# Altium PCB Carte_Barriere_Optique_Interface.PcbDoc
Units mm, origin at the board's own origin, x right, y up, seen from the top; angles counter-clockwise.
Board outline 17.3 x 52.7 mm, 2 copper layers (Top Layer, Bottom Layer); 28 components, 18 nets, 72 pads, 0 vias.
Unrouted connection lines stored in the file: 17.
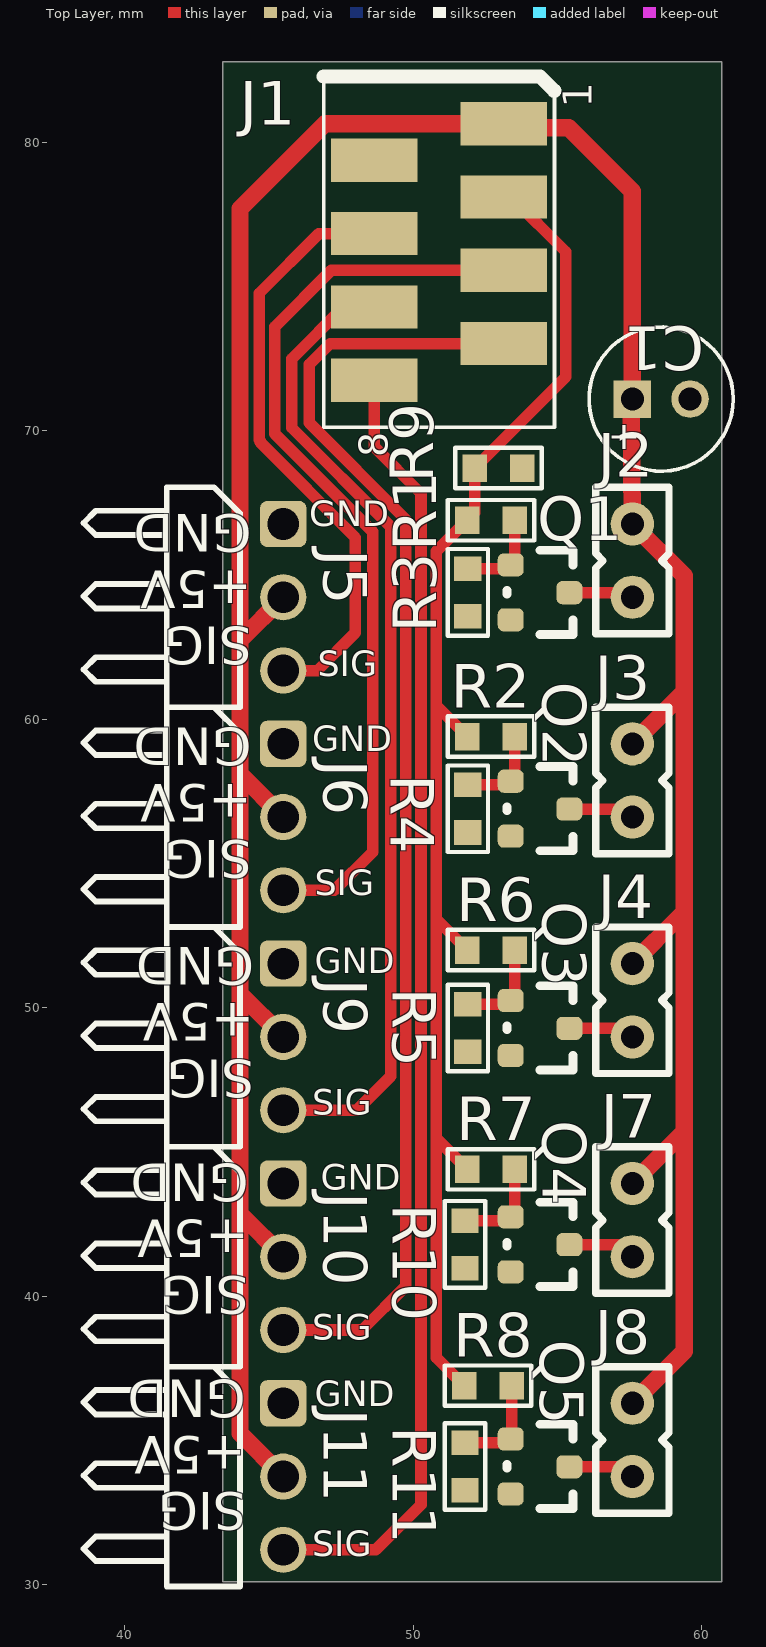
[diagram p0: Top Layer view]
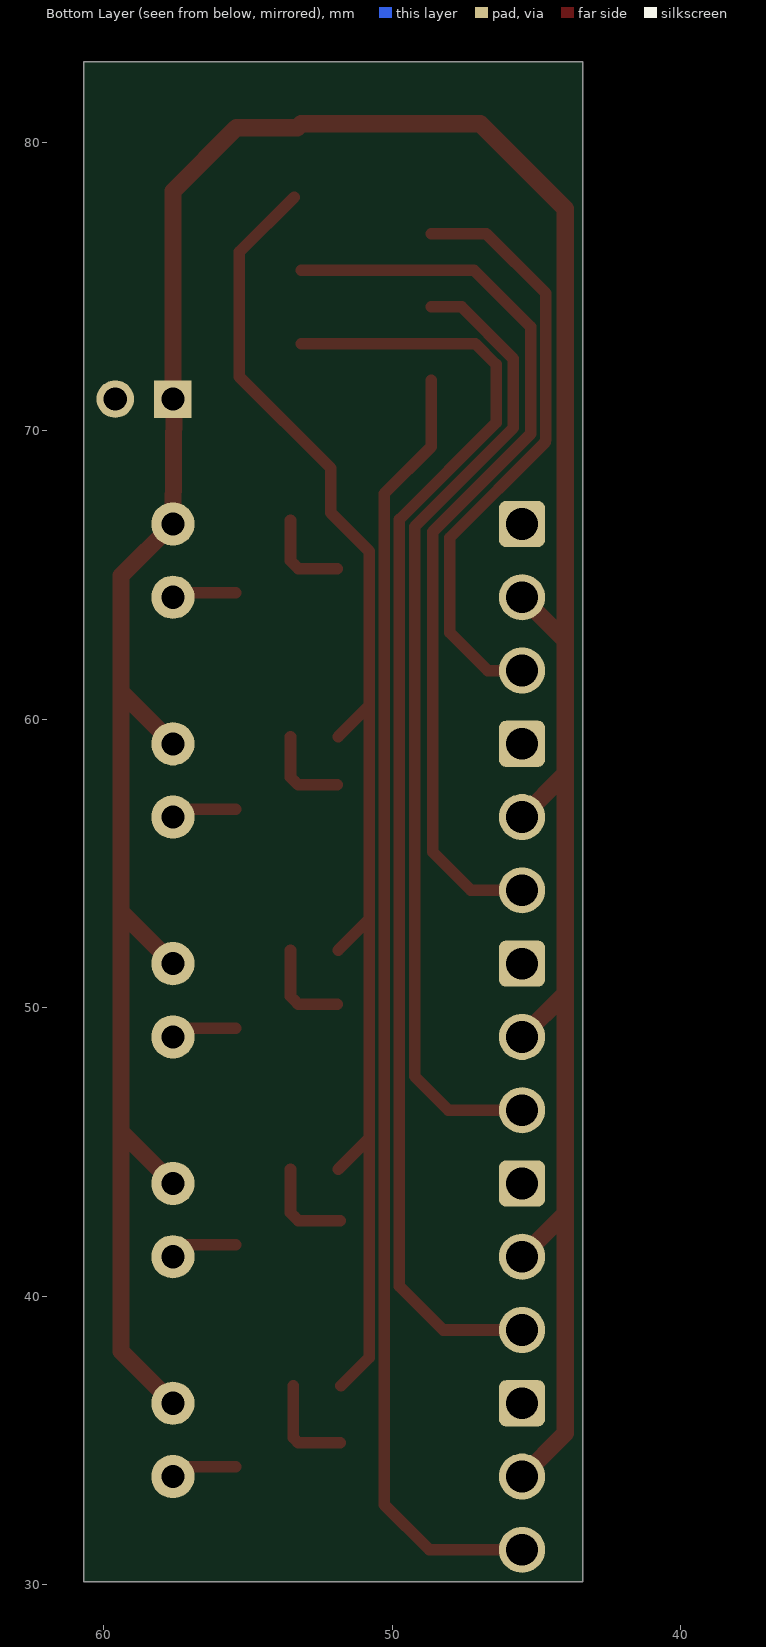
[diagram p1: Bottom Layer view, seen from below]
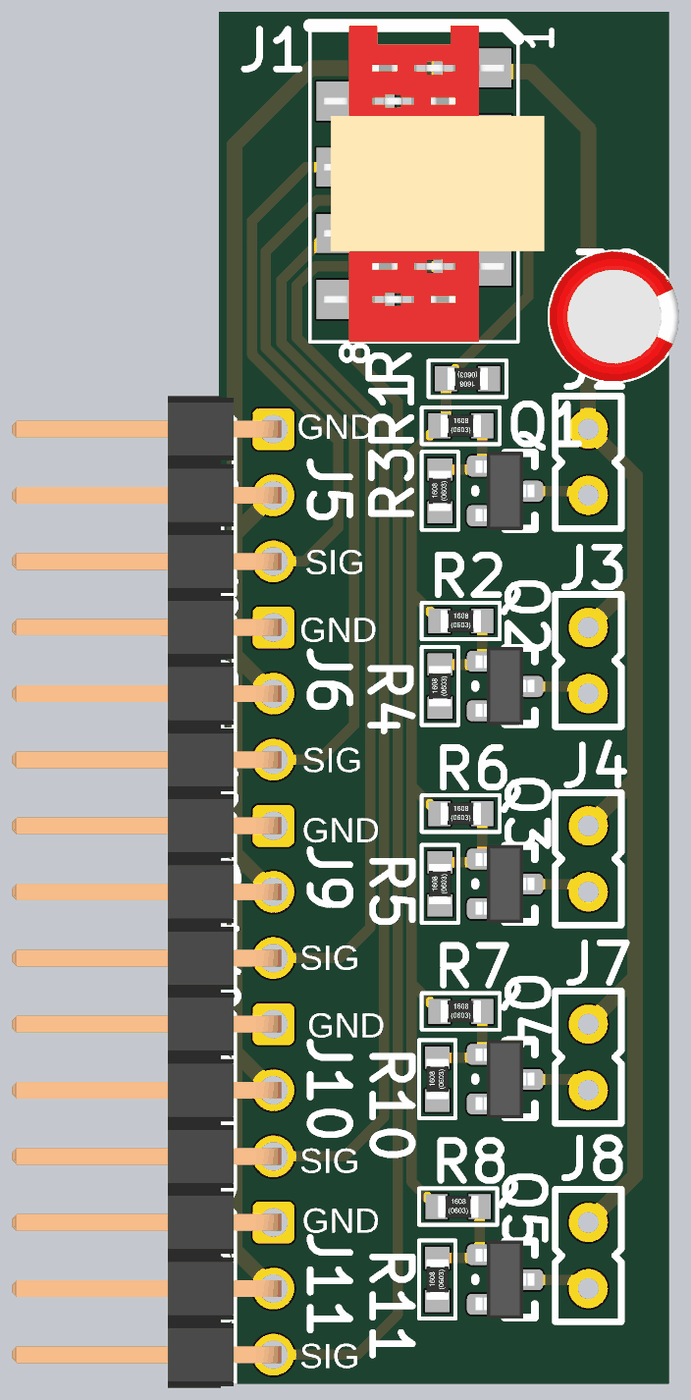
[diagram p2: 3D render of the assembled board from above, using the file's embedded part models]

## Layer stack, top to bottom
Top Solder: solder mask 0.0102, Solder Resist, Dk 3.5
Top Layer: signal copper 0.0356
Dielectric 1: dielectric 0.32, FR-4, Dk 4.8
Bottom Layer: signal copper 0.0356
Bottom Solder: solder mask 0.0102, Solder Resist, Dk 3.5

## Board outline
43.4,30.1 60.7,30.1 60.7,82.8 43.4,82.8

## Design rules (kind name [scope] priority, off if disabled: settings)
AssemblyTestPointUsage [All] p1 off:
AssemblyTestpoint [All] p1 off: testpointundercomponent=TRUE minsize=1.016 maxsize=2.54 preferedsize=1.524 minholesize=0 maxholesize=1.016 preferedholesize=0.813 testpointgrid=0.025 usegrid=TRUE gridtolerance=0 allowsidetop=TRUE allowsidebottom=TRUE
BoardOutlineClearance [All] p1: gap=0.3
Clearance [All] p1: gap=0.125
ComponentClearance [All] p1: gap=0.2 collisioncheckmode=3 verticalgap=1 showdistances=FALSE
DiffPairsRouting [All] p1 off: maxlimit=0.254 minlimit=0.254 mostfreqgap=0.254 toplayer_minwidth=0.381 toplayer_maxwidth=0.381 toplayer_prefwidth=0.381 bottomlayer_minwidth=0.381 bottomlayer_maxwidth=0.381 bottomlayer_prefwidth=0.381 maxuncoupledlength=12.7
FabricationTestPointUsage TestPointUsage [All] p1 off: valid=0 allowmultiple=FALSE
FabricationTestpoint Testpoint [All] p1 off: side=3 testpointundercomponent=TRUE minsize=1.016 maxsize=2.54 preferedsize=1.524 minholesize=0 maxholesize=1.016 preferedholesize=0.813 testpointgrid=0.025 allowsidetop=TRUE allowsidebottom=TRUE usegrid=TRUE gridtolerance=0
FanoutControl Fanout_BGA [IsBGA] p1 off: bgadir=Out bgaviamode=Centered fanoutstyle=Auto fanoutdirection=Alternating viagrid=0.025 // Fanout_BGA (Default Rule)
FanoutControl Fanout_LCC [IsLCC] p2 off: bgadir=Out bgaviamode=Centered fanoutstyle=Auto fanoutdirection=Alternating viagrid=0.025 // Fanout_LCC (Default Rule)
FanoutControl Fanout_SOIC [IsSOIC] p3 off: bgadir=Out bgaviamode=Centered fanoutstyle=Auto fanoutdirection=Alternating viagrid=0.025 // Fanout_SOIC (Default Rule)
FanoutControl Fanout_Small [(CompPinCount < 5)] p4 off: bgadir=Out bgaviamode=Centered fanoutstyle=Auto fanoutdirection=OutThenIn viagrid=0.025 // Fanout_Small (Default Rule)
FanoutControl Fanout_Default [All] p5 off: bgadir=Out bgaviamode=Centered fanoutstyle=Auto fanoutdirection=Alternating viagrid=0.025 // Fanout_Default (Default Rule)
Height [All] p1: minheight=0 maxheight=13 prefheight=10
HoleSize [All] p1: absolutevalues=TRUE maxlimit=6 minlimit=0.15 maxpercent=80.000 minpercent=20.000
HoleToHoleClearance [All] p1: gap=0.4 allowstackedmicrovias=TRUE
MinimumAnnularRing [All] p1: minimumring=0.15
MinimumSolderMaskSliver [All] p1: minsoldermaskwidth=0.15
MinimumSolderMaskSliver SilkscreenOverComponentPads [All] p2 off: minsoldermaskwidth=0.254
NetAntennae [All] p1 off: netantennaetolerance=0
PlaneClearance [All] p1: clearance=0.5
PlaneConnect [All] p1: planeconnectstyle=Relief reliefexpansion=0.4 reliefentries=4 reliefconductorwidth=0.3 reliefairgap=0.2
PolygonConnect [All] p1: connectstyle=Relief reliefconductorwidth=0.25 reliefentries=4 polygonreliefangle="90 Angle" airgapwidth=0.254
RoutingCorners [All] p1: cornerstyle=45-Degree minsetback=1.5 maxsetback=2.54
RoutingVias [All] p1: holewidth=0.2 width=0.5 viastyle="Through Hole" minholewidth=0.2 minwidth=0.4 maxholewidth=0.2 maxwidth=0.6
SilkToSilkClearance [All] p1 off: silktosilkclearance=0.1
SolderMaskExpansion [All] p1: expansion=0.075
Width [All] p1: maxlimit=4 minlimit=0.125 preferedwidth=0.6
10 further rules are at their usual default settings.

## Components (designator, comment, footprint, x,y, rotation, side; value= is the part's Value field where it differs from the comment)
C1 "10 uF" WCAP-ATG8_5x11x2x0.5 58.6,71.1 r180 top
J1 "690367280876" 690367280876 50.9,76.2 r90 top
J2 "22-03-2021" 22-03-2021 57.6,65.5 r90 top
J3 "22-03-2021" 22-03-2021 57.6,57.88 r90 top
J4 "22-03-2021" 22-03-2021 57.6,50.26 r90 top
J5 "61300311021" 61300311021 45.5,64.23 r270 top
J6 "61300311021" 61300311021 45.5,56.61 r270 top
J7 "22-03-2021" 22-03-2021 57.6,42.64 r90 top
J8 "22-03-2021" 22-03-2021 57.6,35.02 r90 top
J9 "61300311021" 61300311021 45.5,48.99 r270 top
J10 "61300311021" 61300311021 45.5,41.37 r270 top
J11 "61300311021" 61300311021 45.5,33.75 r270 top
Q1 "IRLML2502" SOT-23 54.4,64.4 r270 top
Q2 "IRLML2502" SOT-23 54.4,56.9 r270 top
Q3 "IRLML2502" SOT-23 54.4,49.3 r270 top
Q4 "IRLML2502" SOT-23 54.4,41.8 r270 top
Q5 "IRLML2502" SOT-23 54.4,34.1 r270 top
R1 "RC0603FR-07330RL" RESC1608X06N 52.7,66.9 r0 top
R2 "RC0603FR-07330RL" RESC1608X06N 52.7,59.4 r0 top
R3 "RC0603FR-0710KL" RESC1608X06N 51.9,64.4 r90 top
R4 "RC0603FR-0710KL" RESC1608X06N 51.9,56.9 r90 top
R5 "RC0603FR-0710KL" RESC1608X06N 51.9,49.3 r90 top
R6 "RC0603FR-07330RL" RESC1608X06N 52.7,52 r0 top
R7 "RC0603FR-07330RL" RESC1608X06N 52.7,44.4 r0 top
R8 "RC0603FR-07330RL" RESC1608X06N 52.6,36.9 r0 top
R9 "RC0603FR-0710KL" RESC1608X06N 52.959,68.707 r180 top
R10 "RC0603FR-0710KL" RESC1608X06N 51.8,41.8 r90 top
R11 "RC0603FR-0710KL" RESC1608X06N 51.8,34.1 r90 top

## Footprints (in the part's own frame and the unit in brackets; to place one, negate y for a bottom-side part, rotate by r counter-clockwise, add the part's x,y. Pads: shape width x height; smd on the part's side, far side on the other; paste and mask are expansions set on the pad)
22-03-2021 [mm]
  round 1.5 hole 0.8: 1(1.27,0) 2(-1.27,0)
  silkscreen extent -2.54,-1.27 2.54,1.27, body extent -2.54,-1.27 2.54,1.27, height 11.6
61300311021 [mm] "3 pins, 1 row, right angled, gold plating"
  rrect30% 1.6x1.6 hole 1.1: 1(-2.54,0)
  round 1.6 hole 1.1: 2(0,0) 3(2.54,0)
  silkscreen extent -3.81,-6.92 3.81,-1.5, body extent -3.81,-10.06 3.81,0.3, height 2.55
690367280876 [mm] "8 pins, SMT, straight, without Latch"
  rect 1.5x3 smd: 1(4.445,-2.25) 2(3.175,2.25) 3(1.905,-2.25) 4(0.635,2.25) 5(-0.635,-2.25) 6(-1.905,2.25) 7(-3.175,-2.25) 8(-4.445,2.25)
  silkscreen extent -6.08,-4 6.08,4, body extent -6.08,-5 6.08,3.5, height 5.75
RESC1608X06N [mm] "Chip Resistor, 2-Leads, Body 1,6x0,8mm, IPC Medium Density"
  rect 0.85x0.95 smd: 1(-0.825,0) 2(0.825,0)
  silkscreen extent -1.5,-0.7 1.5,0.7, body extent -0.77,-0.42 0.78,0.43, height 0.45
SOT-23 [mm]
  rrect50% 0.8x0.9 smd: 1(-0.952,-1.016) 2(0.953,-1.016) 3(0.013,1.016)
  silkscreen extent -1.46,-1.14 1.46,1.14, body extent -1.5,-1.13 1.5,1.13, height 1.22
WCAP-ATG8_5x11x2x0.5 [mm] "Polarized capacitors, Aluminum Electrolytic Capacitors, 2-Leads, Body 5x11x2x0.5"
  rect 1.3x1.3 hole 0.8: 1(1,0)
  round 1.3 hole 0.8: 2(-1,0)
  silkscreen extent -2.5,-2.5 2.5,2.5, body extent -2.49,-2.5 2.48,2.49, height 11.11

## Part data
C1: library part "WCAP-ATG8, 860010672009", "CAP Alu 10 UF 20% 50 V"
J1: "WR-MM 8p Female SMT Connector with Polarization"
J5 J6 J9 J10 J11: "CONN HEADER 3p horiz. 2.54mm"
Q1 Q2 Q3 Q4 Q5: "MOSFET CANAL N SOT-23"
R1 R2 R6 R7 R8: "RES SMD 330 OHM 1% 1/10W 0603"
R3 R4 R5 R9 R10 R11: "RES SMD 10K OHM 1% 1/10W 0603"

## Nets (pads, with @x,y where several pads share a name; then routed paths per layer and width w, separated by ;. In a path a pad name is that pad's centre, name@x,y a point inside that pad or via, vN(x,y) a via of type N, cw(c..) or ccw(c..) an arc to the next point about the centre after c; other vN are vias at no path point)
5L: C1.1 J1.1 J2.1 J3.1 J4.1 J5.2 J6.2 J7.1 J8.1 J9.2 J10.2 J11.2 | length 119.4
  Top Layer w0.6: 44.07,42.8 J10.2 ; J11.2 44,35.25 44,50.49 ; J9.2 44,50.49 ; J6.2 44,58.11 ; J5.2 44,62.73 ; J1.1 46.945,80.645 44,77.7 44,62.73 ; J1.1@53.295,80.5 55.4,80.5 57.6,78.3 C1.1 ; C1.1@57.563,71.1 J2.1 59.4,64.97 59.4,45.71 ; J8.1 59.4,38.09 59.4,45.71 ; J7.1 59.4,45.71 ; J4.1 59.27,53.2 ; J3.1 59.35,60.9 ; 44,50.49 44,58.11 ; 44,58.11 44,62.73
ENABLE: J1.3 R1.1 R2.1 R6.1 R7.1 R8.1 R9.2 | length 48.8
  Top Layer w0.4: R8.1 50.8,37.875 50.8,45.475 ; R7.1 50.8,45.475 ; R6.1 50.8,53.075 ; R2.1 50.8,60.475 ; J1.3@53.4,78.1 55.3,76.2 55.3,71.873 R9.2 52.134,67.159 R1.1 50.8,65.825 50.8,60.475 ; 50.8,45.475 50.8,53.075 ; 50.8,53.075 50.8,60.475
GND: C1.2 J1.2 J5.1 J6.1 J9.1 J10.1 J11.1 Q1.2 Q2.2 Q3.2 Q4.2 Q5.2 R3.1 R4.1 R5.1 R9.1 R10.1 R11.1
LASER_1: Q1.1 R1.2 R3.2 | length 3.1
  Top Layer w0.4: R3.2 53.257,65.225 Q1.1 53.525,65.493 R1.2
LASER_2: Q2.1 R2.2 R4.2 | length 3.1
  Top Layer w0.4: R4.2 53.257,57.725 Q2.1 53.525,57.993 R2.2
LASER_3: Q3.1 R5.2 R6.2 | length 3.3
  Top Layer w0.4: R5.2 53.257,50.125 Q3.1 53.525,50.393 R6.2
LASER_4: Q4.1 R7.2 R10.2 | length 3.3
  Top Layer w0.4: R10.2 53.257,42.625 Q4.1 53.525,42.893 R7.2
LASER_5: Q5.1 R8.2 R11.2 | length 3.5
  Top Layer w0.4: R11.2 53.257,34.925 Q5.1 53.425,35.093 R8.2
NetJ2_2: J2.2 Q1.3 | length 2.2
  Top Layer w0.4: Q1.3 57.443,64.387 J2.2
NetJ3_2: J3.2 Q2.3 | length 2.3
  Top Layer w0.4: Q2.3 57.323,56.887 J3.2
NetJ4_2: J4.2 Q3.3 | length 2.3
  Top Layer w0.4: Q3.3 57.303,49.287 J4.2
NetJ7_2: J7.2 Q4.3 | length 2.4
  Top Layer w0.4: Q4.3 57.183,41.787 J7.2
NetJ8_2: J8.2 Q5.3 | length 2.3
  Top Layer w0.4: Q5.3 57.263,34.087 J8.2
SIG_1: J1.4 J5.3 | length 21
  Top Layer w0.4: J5.3 46.69,61.69 48,63 48,66.3 44.7,69.6 44.7,69.658 44.675,69.683 44.675,74.775 46.735,76.835 J1.4
SIG_2: J1.5 J6.3 | length 32
  Top Layer w0.4: J6.3 47.27,54.07 48.6,55.4 48.6,66.5 45.2,69.9 45.2,73.6 47.165,75.565 J1.5
SIG_3: J1.6 J9.3 | length 34.1
  Top Layer w0.4: J9.3 48.05,46.45 49.225,47.625 49.225,66.675 45.8,70.1 45.8,72.5 47.595,74.295 J1.6
SIG_4: J1.7 J10.3 | length 45.3
  Top Layer w0.4: J10.3 48.23,38.83 49.75,40.35 49.75,66.925 46.4,70.275 46.4,72.3 47.125,73.025 J1.7
SIG_5: J1.8 J11.3 | length 45.1
  Top Layer w0.4: J11.3 48.71,31.21 50.275,32.775 50.275,67.825 48.65,69.45 J1.8

## Silkscreen, mask and mechanical layers (free items; w line width, h text height)
Top Overlay:
  text "GND" at 46.4,66.4 h1.52
  text "SIG" at 46.7,61.2 h1.52
  text "GND" at 46.5,58.6 h1.52
  text "SIG" at 46.6,53.6 h1.52
  text "GND" at 46.6,50.9 h1.52
  text "SIG" at 46.5,46 h1.52
  text "GND" at 46.8,43.4 h1.52
  text "SIG" at 46.5,38.2 h1.52
  text "GND" at 46.6,35.9 h1.52
  text "SIG" at 46.5,30.7 h1.52
Mechanical 1:
  the board outline again, w0.254

## Text inside footprints (layer, text, board x,y; h text height)
C1: Top Overlay "+" at 57.9,70.2 h1 r180
J1: Top Overlay "8" at 49.122,69.088 h1 r90; Top Overlay "1" at 56.2,81.2 h1 r90
J5: Top Overlay "SIG / +5V / GND" at 44.4,67.1 h1.3 r180
J6: Top Overlay "SIG / +5V / GND" at 44.4,59.7 h1.3 r180
J9: Top Overlay "SIG / +5V / GND" at 44.5,52.1 h1.3 r180
J10: Top Overlay "SIG / +5V / GND" at 44.3,44.6 h1.3 r180
J11: Top Overlay "SIG / +5V / GND" at 44.2,37.1 h1.3 r180